# Altium PCB 按钮小板.PcbDoc
Units mm, origin at the board's own origin, x right, y up, seen from the top; angles counter-clockwise.
Board outline 29.97 x 8 mm, 2 copper layers (Top Layer, Bottom Layer); 11 components, 10 nets, 33 pads, 11 vias.
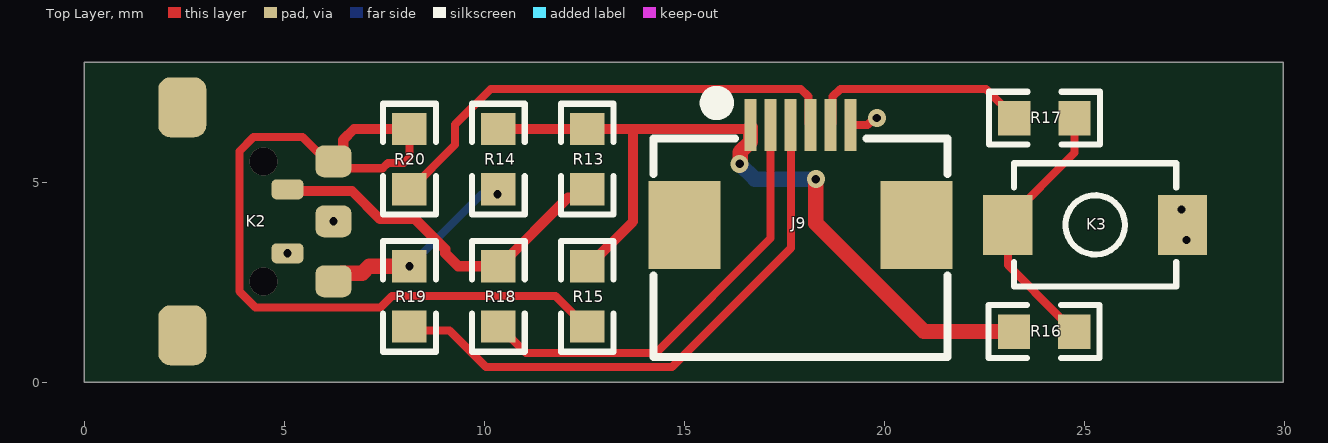
[diagram p0: Top Layer view]
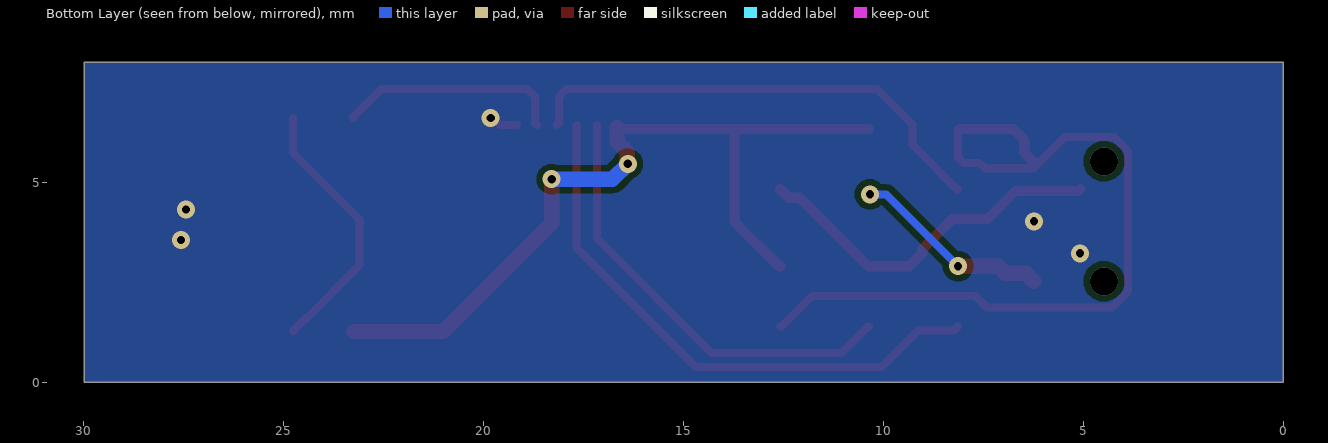
[diagram p1: Bottom Layer view, seen from below]
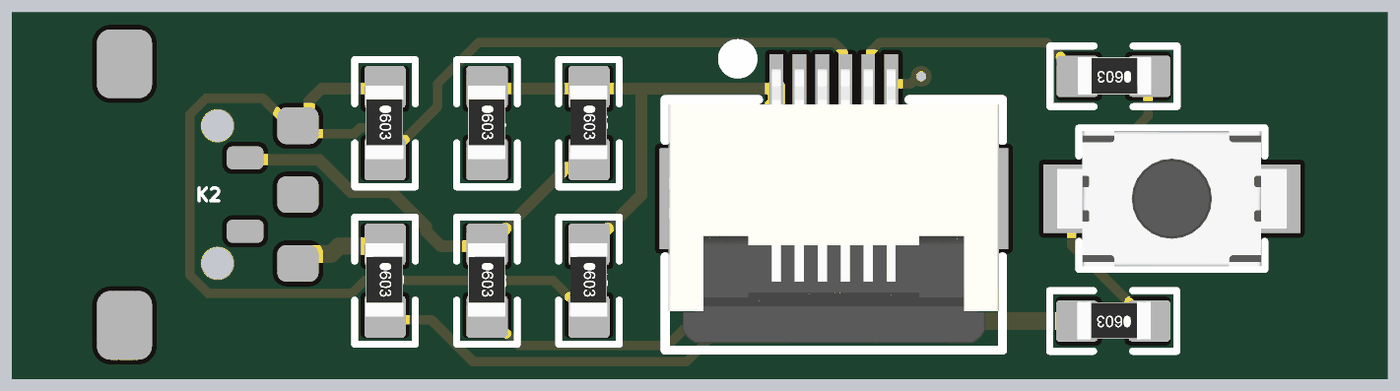
[diagram p2: 3D render of the assembled board from above, using the file's embedded part models]

## Layer stack, top to bottom
Top Solder: solder mask 0.0102, Solder Resist, Dk 3.5
Top Layer: signal copper 0.0356
Dielectric 1: dielectric 0.32, FR-4, Dk 4.8
Bottom Layer: signal copper 0.0356
Bottom Solder: solder mask 0.0102, Solder Resist, Dk 3.5

## Board outline
0,0 29.972,0 29.972,8.001 0,8.001

## Design rules (kind name [scope] priority, off if disabled: settings)
Clearance [All] p1: gap=0.152 ignorepadtopadclearanceinfootprint=FALSE
PolygonConnect [All] p1: connectstyle=Relief reliefconductorwidth=0.254 reliefentries=4 polygonreliefangle="90 Angle" airgapwidth=0.254
RoutingVias [All] p1: holewidth=0.21 width=0.45 viastyle="Through Hole" minholewidth=0.21 minwidth=0.45 maxholewidth=0.711 maxwidth=1.27
SolderMaskExpansion [All] p1: expansion=0.102 istentingtop=FALSE
Width [All] p1: maxlimit=1.27 minlimit=0.152 preferedwidth=0.203
30 further rules are at their usual default settings.

## Components (designator, comment, footprint, x,y, rotation, side; value= is the part's Value field where it differs from the comment)
J9 "FPC-6P" FPC0.5-WT-6P 17.907,3.937 r0 top
K2 "旋转编码器" 旋转编码器 4.34,4.026 r90 top
K3 "微动开关" 轻触开关 25.273,3.937 r0 top
R13 "5.1k" 0603-RES 12.573,5.579 r270 top
R14 "5.1k" 0603-RES 10.351,5.579 r270 top
R15 "5.1k" 0603-RES 12.573,2.15 r270 top
R16 "5.1k" 0603-RES 23.994,1.27 r180 top
R17 "470Ω" 0603-RES 24.003,6.604 r180 top
R18 "470Ω" 0603-RES 10.351,2.15 r270 top
R19 "470Ω" 0603-RES 8.128,2.15 r270 top
R20 "470Ω" 0603-RES 8.128,5.579 r270 top

## Footprints (in the part's own frame and the unit in brackets; to place one, negate y for a bottom-side part, rotate by r counter-clockwise, add the part's x,y. Pads: shape width x height; smd on the part's side, far side on the other; paste and mask are expansions set on the pad)
0603-RES [mm]
  rect 0.806x0.864 smd: 1(-0.753,0) 2(0.753,0)
  silkscreen extent -1.39,-0.66 1.39,0.66, body extent -0.82,-0.42 0.78,0.4, height 0.45
FPC0.5-WT-6P [mm] "长：7.2mm，宽：5.2mm，高：2mm               黄晶宝石"
  rect 1.8x2.2 smd: 0(-2.9,0) 0(2.9,0)
  rect 0.3x1.3 smd: 1(-1.25,2.497) 2(-0.75,2.497) 3(-0.25,2.497) 4(0.25,2.497) 5(0.75,2.497) 6(1.25,2.497)
  silkscreen extent -3.67,-3.3 3.67,3.23, body extent -3.6,-3.15 3.6,2.85, height 2
旋转编码器 [mm]
  rrect50% 0.8x0.9 smd: A(-1.5,-1.89) B(1.5,-1.89) COM(0,-1.89)
  rrect50% 0.5x0.8 smd: D(-0.8,-0.74) E(0.8,-0.74)
  rrect50% 1.5x1.2 smd: NC(-2.85,1.89) NC(2.85,1.89)
轻触开关 [mm]
  rect 1.23x1.5 smd: 1(-2.185,0) 2(2.185,0)
  silkscreen extent -2.03,-1.54 2.03,1.54, body extent -2.5,-1.48 2.5,1.47, height 2.01

## Part data
K2: library part 选装编码器
R13 R14 R15 R16 R17 R18 R19 R20: library part 电阻, "电阻"

## Via types
v1: diameter 0.45, hole 0.203, Top Layer to Bottom Layer, 6 vias
v2: diameter 0.45, hole 0.21, Top Layer to Bottom Layer, 3 vias
v3: diameter 0.7, hole 0.7, Top Layer to Bottom Layer, 2 vias

## Nets (pads, with @x,y where several pads share a name; then routed paths per layer and width w, separated by ;. In a path a pad name is that pad's centre, name@x,y a point inside that pad or via, vN(x,y) a via of type N, cw(c..) or ccw(c..) an arc to the next point about the centre after c; other vN are vias at no path point)
3.3V: J9.1 R13.1 R14.1 R15.1 R16.2 | length 20.6
  Top Layer w0.254: R14.1 R13.1 13.716,6.332 ; R15.1 12.602,2.903 13.716,4.018 13.716,6.332 ; J9.1 16.657,6.373 16.616,6.332 13.716,6.332
  Top Layer w0.381: v2(16.383,5.461) 16.396,5.474 16.396,5.754 16.657,6.015 J9.1@16.657,6.373 ; v2(18.288,5.08) 18.288,3.971 20.989,1.27 R16.2
  Bottom Layer w0.381: v2(16.383,5.461) 16.764,5.08 v2(18.288,5.08)
EC11-A: J9.3 R19.2 | length 14.3
  Top Layer w0.203: R19.2 8.229,1.296 9.132,1.296 10.046,0.381 14.69,0.381 17.664,3.355 17.664,6.427 J9.3
EC11-B: J9.4 R20.2 | length 12.1
  Top Layer w0.203: R20.2 8.157,4.826 9.271,5.94 9.271,6.447 10.162,7.338 17.912,7.338 18.109,7.142 18.109,6.482 J9.4
EC11-K: J9.2 R18.2 | length 11.1
  Top Layer w0.203: R18.2 10.379,1.397 11.04,0.737 14.292,0.737 17.157,3.602 J9.2
GND: J9.6 K2.COM K2.D K3.2 | length 0.7
  Top Layer w0.203: J9.6 19.579,6.434 19.749,6.604 v1(19.812,6.604)
  other v1: 5.08,3.226 27.559,3.556 6.23,4.026 27.432,4.318
KEY: J9.5 R17.2 | length 5.7
  Top Layer w0.203: J9.5 18.705,6.482 18.705,7.142 18.902,7.338 22.545,7.338 23.25,6.633 R17.2
NetK2_A: K2.A R14.2 R19.1 | length 5
  Top Layer w0.203: v2(10.331,4.699) R14.2@10.336,4.704
  Top Layer w0.381: K2.A 6.434,2.73 6.951,2.73 7.124,2.903 v1(8.128,2.903)
  Bottom Layer w0.203: v1(8.128,2.903) 9.924,4.699 v2(10.331,4.699)
NetK2_B: K2.B R15.2 R20.1 | length 20.7
  Top Layer w0.203: R20.1 8.128,5.624 7.987,5.483 7.591,5.483 7.461,5.354 6.234,5.354 5.457,6.13 4.23,6.13 3.876,5.776 3.876,2.276 4.28,1.872 7.409,1.872 7.696,2.159 11.782,2.159 12.544,1.397 R15.2
  Top Layer w0.254: K2.B 6.264,5.526 6.473,5.735 6.473,6.062 6.743,6.332 R20.1@8.099,6.332
NetK2_E: K2.E R13.2 R18.1 | length 9.1
  Top Layer w0.254: K2.E 5.123,4.783 6.691,4.783 7.394,4.08 8.272,4.08 9.025,3.327 9.025,3.226 9.347,2.903 R18.1 10.379,2.903 12.089,4.613 12.36,4.613 R13.2
NetK3_1: K3.1 R16.1 R17.1 | length 6.7
  Top Layer w0.203: R16.1 24.747,1.299 24.446,1.6 24.417,1.6 23.088,2.929 K3.1 23.088,4.072 24.756,5.74 R17.1
pads on no net: J9.0 K2.NC
copper on no net:
  other v3: 4.48,2.526 4.48,5.526

## Polygon pours and split planes (outlines as drawn)
GND on Bottom Layer "GND_L02_P000" (solid, pour order 0): 0,8.001 29.972,8.001 29.972,0 0,0